# Altium PCB AMISyringeDriverHW10.PcbDoc
Units mm, origin at the board's own origin, x right, y up, seen from the top; angles counter-clockwise.
Board outline 96 x 43.5 mm, 2 copper layers (Top Layer, Bottom Layer); 55 components, 52 nets, 199 pads, 126 vias.
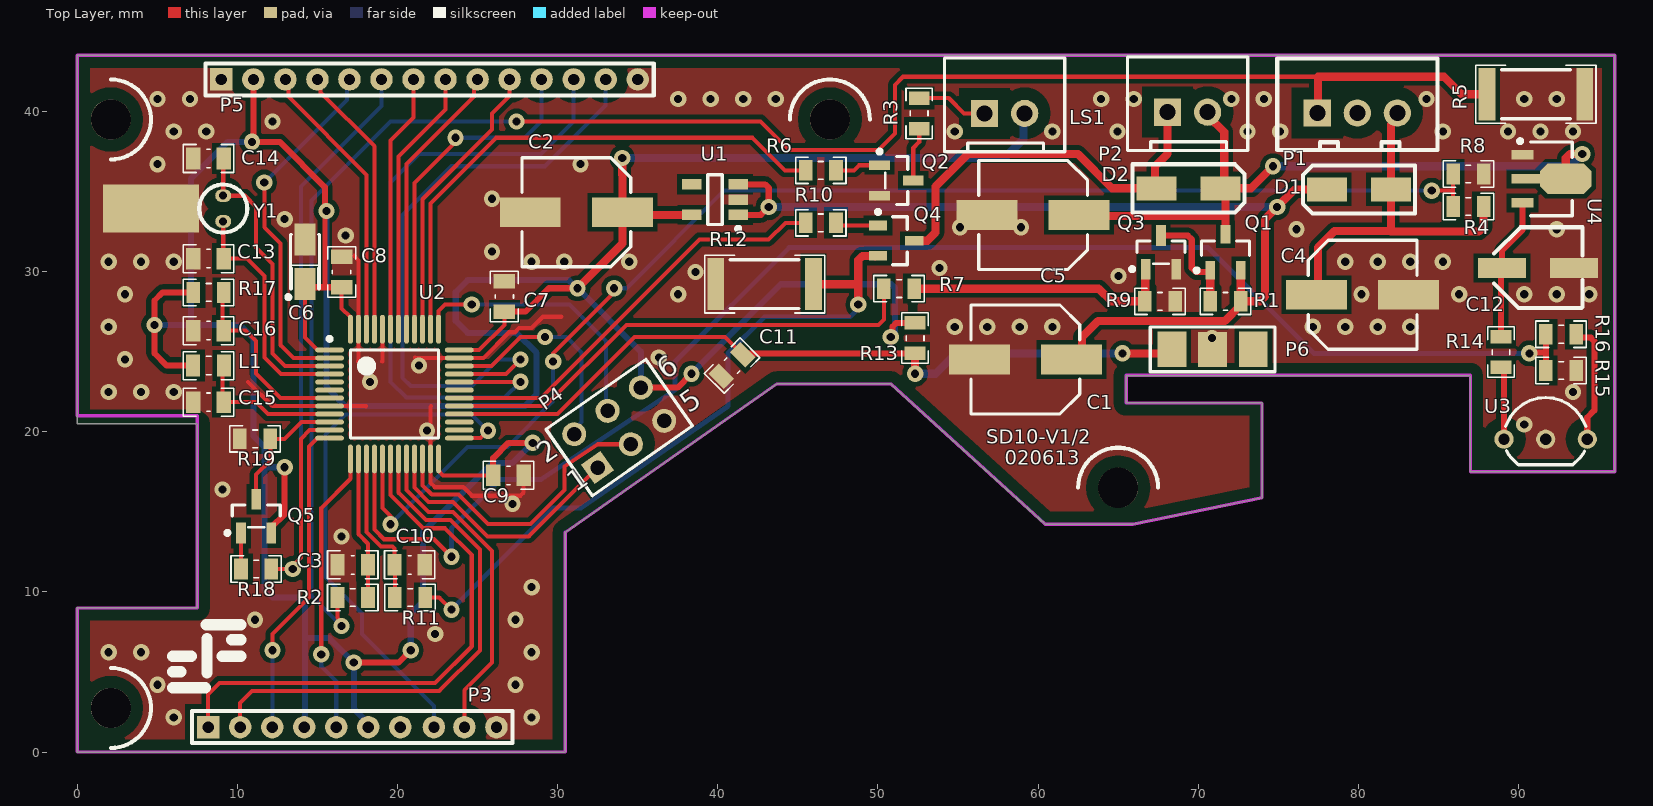
[diagram p0: Top Layer view]
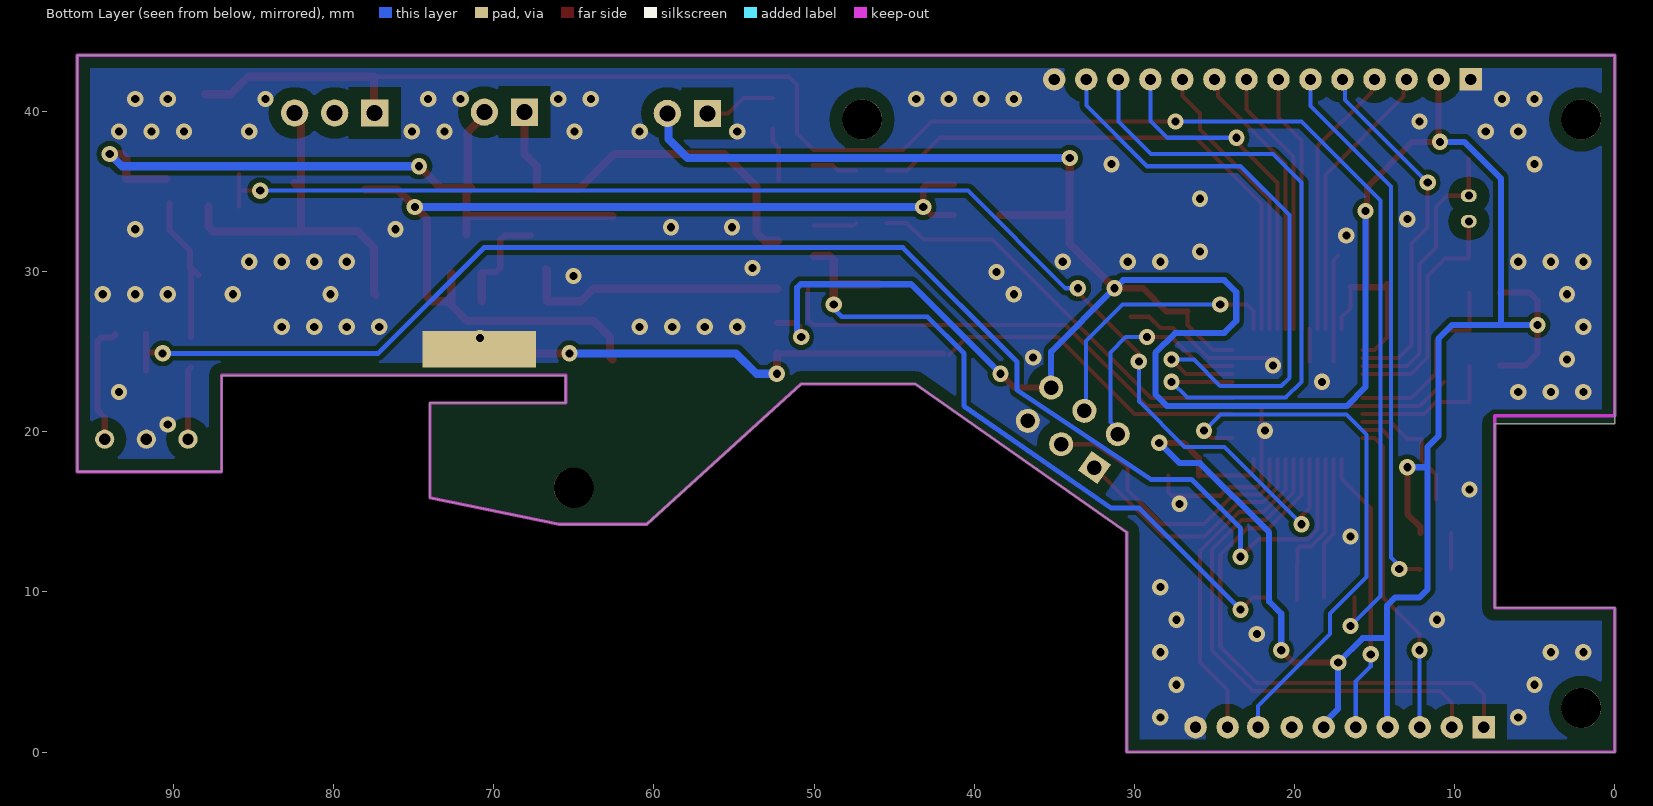
[diagram p1: Bottom Layer view, seen from below]
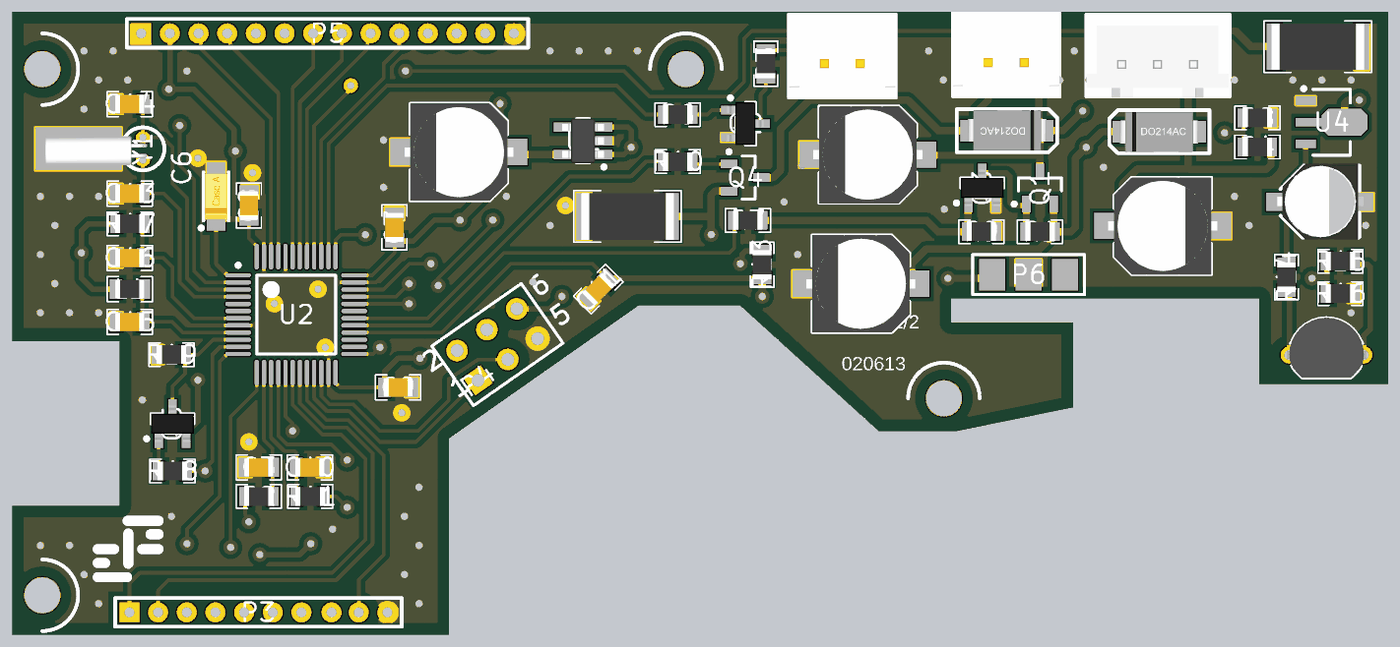
[diagram p2: 3D render of the assembled board from above, using the file's embedded part models]

## Layer stack, top to bottom
Top Layer: signal copper 0.0356
Dielectric: dielectric 0.32, FR-4, Dk 4.8
Bottom Layer: signal copper 0.0356

## Board outline
0,9 7.5,9 7.5,20.5 0,20.5 0,43.5 96,43.5 96,17.5 87,17.5 87,23.5 65.5,23.5 65.5,21.8 74,21.8 74,15.875 65.913,14.224 60.452,14.224 50.8,22.987 43.688,22.987 30.48,13.716 30.48,0 0,0

## Design rules (kind name [scope] priority, off if disabled: settings)
Clearance [All] p1: gap=0.305
HoleSize [All] p1: absolutevalues=TRUE maxlimit=12.7 minlimit=0.025 maxpercent=80.000 minpercent=20.000
PolygonConnect [All] p1: connectstyle=Direct reliefconductorwidth=0.254 reliefentries=4 polygonreliefangle="90 Angle"
RoutingVias [All] p1: holewidth=0.508 width=1.016 viastyle="Through Hole" minholewidth=0.508 minwidth=1.016 maxholewidth=0.711 maxwidth=1.27
SilkscreenOverComponentPads SilkToSolderMaskClearance [IsPad] p1: minsilkscreentomaskgap=0.254
SolderMaskExpansion [All] p1: expansion=0.102
Width [All] p1: maxlimit=0.508 minlimit=0.254 preferedwidth=0.254 minimp=50.000000 maximp=50.000000 favimp=50.000000
26 further rules are at their usual default settings.

## Components (designator, comment, footprint, x,y, rotation, side; value= is the part's Value field where it differs from the comment)
C1 "100uF" CAP_EL_SMD_6.3X5.4 59.207,24.511 r180 top
C2 "100uF" CAP_EL_SMD_6.3X5.4 31.166,33.706 r180 top
C3 "100nF" CAP0805 17.206,11.684 r0 top
C4 "100uF" CAP_EL_SMD_6.3X5.4 80.264,28.55 r0 top
C5 "100uF" CAP_EL_SMD_6.3X5.4 59.69,33.528 r180 top
C6 "10uF" CAP_TANTAL_TYPE_A 11.836,32.603 r270 top
C7 "100nF" CAP0805 26.67,28.448 r270 top
C8 "100nF" CAP0805 16.51,29.972 r270 top
C9 "100nF" CAP0805 26.924,17.272 r180 top
C10 "100nF" CAP0805 20.762,11.684 r180 top
C11 "100nF" CAP0805 40.894,24.13 r45 top
C12 "10uF" CAP_EL_SMD_4X5.3 91.222,30.226 r0 top
C13 "10pF" CAP0805 8.204,30.81 r0 top
C14 "10pF" CAP0805 8.204,37.059 r0 top
C15 "100nF" CAP0805 8.204,21.844 r0 top
C16 "100nF" CAP0805 8.204,26.314 r0 top
D1 "US1M" DO-241AC 80.112,35.128 r180 top
D2 "US1M" DO-241AC 69.317,35.204 r0 top
L1 "100uH" IND0805 8.204,24.13 r0 top
LS1 "SPK" XH-2PIN 57.912,39.878 r0 top
P1 "Battery" XH-3PIN 79.934,39.903 r0 top
P2 "Motor Output" XH-2PIN 69.337,39.954 r0 top
P3 "Header 10" HDR_1X10-2MM 17.177,1.552 r0 top
P4 "Header 3X2" HDR2X3 32.494,17.762 r35 top
P5 "Header 14" HDR_1X14-2MM 22,42 r0 top
P6 "PCB SWITCH" MICROSW_VERTICAL 70.901,25.146 r0 top
Q1 "IRLML6402" Micro3_N 71.704,31.2 r90 top
Q2 "PMBT3904" SOT23_N 51.156,35.687 r0 top
Q3 "PMBT3904" SOT23_N 67.676,31.2 r90 top
Q4 "IRLML2502" SOT-23_N 51.13,31.928 r0 top
Q5 "PMBT3906" SOT23_N 11.176,14.732 r90 top
R1 "100K" RES0805 71.704,28.143 r180 top
R2 "470K" RES0805 17.206,9.652 r180 top
R3 "47R" RES0805 52.578,39.878 r270 top
R4 "470K" RES0805 86.868,34.061 r180 top
R5 "0R500" RES2512 91.086,41.072 r180 top
R6 "10K" RES0805 46.431,36.322 r180 top
R7 "10K" RES0805 51.323,28.931 r0 top
R8 "100K" RES0805 86.868,36.093 r0 top
R9 "470K" RES0805 67.615,28.143 r0 top
R10 "10K" RES0805 46.431,33.045 r0 top
R11 "470K" RES0805 20.787,9.652 r0 top
R12 "0R500" RES2512 42.926,29.21 r0 top
R13 "10K" RES0805 52.324,25.842 r270 top
R14 "100R" RES0805 88.9,24.968 r270 top
R15 "100K" RES0805 92.659,26.086 r0 top
R16 "82K" RES0805 92.659,23.825 r180 top
R17 "10K" RES0805 8.204,28.702 r180 top
R18 "10K" RES0805 11.176,11.43 r180 top
R19 "10k" RES0805 11.11,19.558 r0 top
U1 "XC6204E331MR" SOT-23-5 39.827,34.493 r180 top
U2 "STM32F103C8T6" LQFP48_N 19.812,22.352 r0 top
U3 "UGN3503/AN503" "TO-92 BENT" 91.694,19.533 r0 top
U4 "HT7550-2" SOT89N 92.05,35.789 r0 top
Y1 "32.768kHz" CRYSTAL_NC308-RA 9.119,33.934 r270 top

## Footprints (in the part's own frame and the unit in brackets; to place one, negate y for a bottom-side part, rotate by r counter-clockwise, add the part's x,y. Pads: shape width x height; smd on the part's side, far side on the other; paste and mask are expansions set on the pad)
CAP0805 [mm] "Chip Capacitor, 2-Leads, Body 2/00x1/25mm, IPC Medium Density DESIGNER:ABBAS BASEREH"
  rect 0.9x1.35 smd: 1(-0.95,0) 2(0.95,0)
  silkscreen extent -1.58,-0.87 1.58,0.88, body extent -1.03,-0.65 1.02,0.65, height 0.5
CAP_EL_SMD_4X5.3 [mm]
  rect 3x1.25 smd: 1(-2.25,0) 2(2.25,0)
  silkscreen extent -2.74,-2.49 2.77,2.54, body extent -2.96,-2.62 3.04,2.68, height 6.42
CAP_EL_SMD_6.3X5.4 [mm] "Aluminum Electrolytic Capacitor, Body 6.60x6.60x5.80mm, IPC Low Density"
  rect 3.8x1.85 smd: 1(-2.875,0) 2(2.875,0)
  silkscreen extent -3.4,-3.4 3.4,3.4, body extent -3.8,-3.4 3.8,3.4, height 6.36
CAP_TANTAL_TYPE_A [mm]
  rect 2x1.3 smd: 1(3.393,2.388) 2(0.593,2.388)
  silkscreen extent 0.29,1.22 4.32,3.29, body extent 0.41,1.59 3.61,3.19, height 1.6
CRYSTAL_NC308-RA [mm] "32.768khz N308 Right angle"
  oval 0.8x1 hole 0.5: 1(0.8,0) 2(-0.8,0)
  rect 3x6 smd: 3(0,-4.5)
  silkscreen extent -1.5,-1.5 1.5,1.5, body extent -0.87,-6.81 1.13,0.33, height 2.2
DO-241AC [mm]
  rect 2.5x1.5 smd: 1(-1.918,-0.005) 2(2.082,-0.005)
  silkscreen extent -3.42,-1.5 3.58,1.5, body extent -2.64,-1.37 2.84,1.42, height 2.39
HDR2X3 [mm] "Connector; Header; 3x2 Position"
  rect 1.5x1.5 hole 0.9: 1(0,0)
  round 1.5 hole 0.9: 2(0,2.54) 3(2.54,0) 4(2.54,2.54) 5(5.08,0) 6(5.08,2.54)
  silkscreen extent -1.27,-1.27 6.35,3.81
HDR_1X10-2MM [mm]
  rect 1.4x1.4 hole 0.7: 1(-9,0)
  round 1.4 hole 0.7: 2(-7,0) 3(-5,0) 4(-3,0) 5(-1,0) 6(1,0) 7(3,0) 8(5.097,0) 9(7,0)
  round 1.4 hole 0.7 mask+0.102: 10(9,0)
  silkscreen extent -10,-1 10,1
HDR_1X14-2MM [mm]
  rect 1.4x1.4 hole 0.7: 1(-13,0)
  round 1.4 hole 0.7: 2(-11,0) 3(-9,0) 4(-7,0) 5(-5,0) 6(-3,0) 7(-1,0) 8(1,0) 9(3,0) 10(5,0) 11(7,0) 12(9,0) 13(11,0) 14(13,0)
  silkscreen extent -14,-1 14,1
IND0805 [mm] "Chip Inductor, 2-Leads, Body 2/00x1/25mm, IPC Medium Density DESIGNER:ABBAS BASEREH"
  rect 0.87x1.37 smd: 1(-0.97,0) 2(0.97,0)
  silkscreen extent -1.57,-0.87 1.58,0.87, body extent -1.02,-0.65 1.03,0.65, height 0.5
LQFP48_N [mm] "Thin QFP, 48-Leads, Body 7x7mm, Pitch 0.5mm, IPC Medium Density"
  oval 1.8x0.3 smd: 1(-4.05,2.75) 2(-4.05,2.25) 3(-4.05,1.75) 4(-4.05,1.25) 5(-4.05,0.75) 6(-4.05,0.25) 7(-4.05,-0.25) 8(-4.05,-0.75) 9(-4.05,-1.25) 10(-4.05,-1.75) 11(-4.05,-2.25) 12(-4.05,-2.75) 25(4.05,-2.75) 26(4.05,-2.25) 27(4.05,-1.75) 28(4.05,-1.25) 29(4.05,-0.75) 30(4.05,-0.25) 31(4.05,0.25) 32(4.05,0.75) 33(4.05,1.25) 34(4.05,1.75) 35(4.05,2.25) 36(4.05,2.75)
  oval 0.3x1.8 smd: 13(-2.75,-4.05) 14(-2.25,-4.05) 15(-1.75,-4.05) 16(-1.25,-4.05) 17(-0.75,-4.05) 18(-0.25,-4.05) 19(0.25,-4.05) 20(0.75,-4.05) 21(1.25,-4.05) 22(1.75,-4.05) 23(2.25,-4.05) 24(2.75,-4.05) 37(2.75,4.05) 38(2.25,4.05) 39(1.75,4.05) 40(1.25,4.05) 41(0.75,4.05) 42(0.25,4.05) 43(-0.25,4.05) 44(-0.75,4.05) 45(-1.25,4.05) 46(-1.75,4.05) 47(-2.25,4.05) 48(-2.75,4.05)
  silkscreen extent -4.17,-2.75 2.75,3.57, body extent -3.5,-3.5 3.5,3.5, height 1.6
Micro3_N [mm] "SOT23, 3-Leads, Body 2.9x1.3mm, Pitch 0.95mm, Lead Span 2.3mm, IPC Medium Density"
  rect 1.15x0.6 smd: 1(-1.125,0.95) 2(-1.125,-0.95) 3(1.125,0)
  silkscreen extent -1.25,-1.5 0.7,1.92, body extent -0.7,-1.5 0.7,1.5, height 1.12
MICROSW_VERTICAL [mm] "Vertical micro switch"
  rect 1.8x2.2 smd: 1(2.54,0) 2(0,-0.007) 3(-2.54,0)
  rect 7.1x2.3 smd far side: 4(0,0)
  silkscreen extent -3.9,-1.4 3.9,1.4
RES0805 [mm] "Chip Resistor, 2-Leads, Body 2/00x1/25mm, IPC Medium Density DESIGNER:ABBAS BASEREH"
  rect 0.85x1.3 smd: 1(-0.95,0) 2(0.95,0)
  silkscreen extent -1.58,-0.82 1.58,0.82, body extent -1.02,-0.65 1.02,0.65, height 0.5
RES2512 [mm] "Chip Resistor, 2-Leads, Body 6/40x3/20mm, IPC Medium Density DESIGNER:ABBAS BASEREH"
  rect 1.05x3.25 smd: 1(-3.05,0) 2(3.05,0)
  silkscreen extent -3.75,-1.8 3.75,1.8, body extent -3.22,-1.63 3.22,1.63, height 0.7
SOT23_N [mm] "SOT23, 3-Leads, Body 2.9x1.3mm, Pitch 0.95mm, Lead Span 2.3mm, IPC Medium Density"
  rect 1.3x0.6 smd: 1(-1.05,0.95) 2(-1.05,-0.95) 3(1.05,0)
  silkscreen extent -1.17,-1.5 0.7,1.92, body extent -1.27,-1.5 1.27,1.5, height 1.1
SOT89N [mm] "SOT89, 3-Leads, Body 4.5x2.4 mm, Pitch 1.5mm, Lead Span 4.1mm, IPC Medium Density"
  rect 1.4x0.6 smd: 1(-1.8,1.5) 3(-1.8,-1.5)
  rect 1.8x0.6 smd: 2(-1.6,0)
  oct 3.2x1.9 smd: 2(0.9,0)
  silkscreen extent -2.07,-2.3 1.3,2.47, body extent -1.3,-2.3 1.3,2.3, height 1.6
SOT-23-5 [mm] "SOT23, 5-Leads, Body 2.90x2.80mm, Pitch 0.95mm, IPC Low Density"
  rect 1.2x0.65 smd: 1(-1.45,0.95) 2(-1.45,0) 3(-1.45,-0.95) 4(1.45,-0.95) 5(1.45,0.95)
  silkscreen extent -1.58,-1.55 0.45,1.95, body extent -1.49,-1.55 1.49,1.55, height 1.3
SOT-23_N [mm] "SOT23, 3-Leads, Body 2.9x1.3mm, Pitch 0.95mm, Lead Span 2.3mm, IPC Medium Density"
  rect 1.15x0.6 smd: 1(-1.125,0.95) 2(-1.125,-0.95) 3(1.125,0)
  silkscreen extent -1.25,-1.5 0.7,1.92, body extent -0.7,-1.5 0.7,1.5, height 1.11
"TO-92 BENT" [mm] "DESIGNER :ABBAS BASEREH"
  round 1.2 hole 0.7: 1(-2.6,0) 2(0,0) 3(2.6,0)
  silkscreen extent -2.51,-1.6 2.51,2.6, body extent -2.79,-1.59 2.79,2.61, height 10
XH-2PIN [mm]
  rect 1.7x1.7 hole 1: 1(-1.25,0)
  round 1.7 hole 1: 2(1.25,0)
  silkscreen extent -3.75,-2.4 3.75,3.45, body extent -3.7,-2.35 3.7,3.4, height 7
XH-3PIN [mm]
  rect 1.7x1.7 hole 1: 1(-2.5,0)
  round 1.7 hole 1: 2(0,0) 3(2.5,0)
  silkscreen extent -5,-2.31 5,3.4, body extent -4.98,-2.42 4.92,3.33, height 7

## Part data
C1 C4 C5: library part Cap2, "Electrolyte 16V"
C2: library part Cap2, "Electrolyte  16V"
C3 C7 C8 C9 C10 C11 C13 C14 C15 C16: library part Cap, "Capacitor"
C6: library part Cap2, "tantal 10V"
C12: library part Cap2, "Electrolyte 10V"
D1 D2: library part "Diode 1N4001", "1 Amp General Purpose Rectifier"
L1: library part Inductor, "Ferrite Bead"
LS1: library part Buzzer, "Magnetic Transducer Buzzer"
P1: library part "Header 3", "Header, 3-Pin"
P2: library part "Header 2", "Header, 2-Pin"
P3: "Header, 10-Pin"
P4: "Header, 3-Pin, Dual row"
P5: "Header, 14-Pin"
P6: library part "Header 4", "Header, 4-Pin"
Q1: library part IRLML6401, "HEXFET Power MOSFET"
Q2 Q3: "NPN Switching Transistor"
Q4: library part IRLML2402, "HEXFET Power MOSFET"
Q5: "PNP Switching Transistor"
R1 R2 R3 R4 R5 R6 R7 R8 R9 R10 R11 R12 R13 R14 R15 R16 R17 R18 R19: library part Res1, "Resistor"
U1: "300mA/150mA High Speed LDO Regulators with ON-OFF Control"
U2: "STM32 ARM-based 32-bit MCU with 64 Kbytes Flash, 48-pin LQFP, Industrial Temperature"
U3: library part UGN3503, "RATIOMETRIC, LINEAR / HALL-EFFECT SENSORS"
U4: library part HT7530-1, "5.0V 100mA Low Power,  Low Dropout Voltage (LDO) Regulator"
Y1: library part XTAL_Crystal_G, "XTAL Crystal"

## Free pads (board coordinates)
  round 2.5 hole 2.5: ""(2.1,2.75) ""(2.1,39.5) ""(47,39.5) ""(65,16.5)

## Via types
v1: diameter 1.016, hole 0.508, Top Layer to Bottom Layer, tented both sides, 117 vias
v2: diameter 1.016, hole 0.508, Top Layer to Bottom Layer, 9 vias

## Nets (pads, with @x,y where several pads share a name; then routed paths per layer and width w, separated by ;. In a path a pad name is that pad's centre, name@x,y a point inside that pad or via, vN(x,y) a via of type N, cw(c..) or ccw(c..) an arc to the next point about the centre after c; other vN are vias at no path point)
+3V3: C2.1 C6.1 C7.2 C8.2 C9.2 L1.1 LS1.2 P3.4 P3.6 P4.6 P5.2 Q5.2 R13.1 R17.2 U1.5 U2.1 U2.24 U2.36 U2.48 | length 250.1
  Top Layer w0.254: C6.1 14.224,25.89 15.012,25.102 U2.1 ; C8.2 16.51,27.704 17.062,27.152 U2.48 ; U2.24 22.562,17.564 22.854,17.272 C9.2 ; U2.36 25.102,25.102 26.67,26.67 C7.2
  Top Layer w0.305: 15.467,29.049 v1@15.467,33.782
  Top Layer w0.381: L1.1@7.158,24.13 5.588,24.13 4.826,24.892 v1(4.826,26.67) 4.826,28.194 5.334,28.702 R17.2@7.178,28.702 ; P5.2 11,38.178 v1(10.922,38.1) 12.645,38.1 15.467,35.279 15.467,33.885 v1(15.57,33.782) ; Q5.2 12.126,14.032 12.954,14.86 v1(12.954,17.78) ; C6.1 14.412,29.022 15.494,29.022 ; 15.467,29.049 15.494,29.022 ; C8.2 15.494,29.022 ; v1(17.272,5.588) 20.066,5.588 v1(20.828,6.35) ; C9.2 25.974,18.354 26.924,19.304 v1(28.448,19.304) ; C7.2 27.993,27.498 29.451,28.956 v1(31.242,28.956) ; P4.6 37.488,22.756 v1(38.354,23.622) ; v1(50.8,25.908) 50.922,26.03 50.922,26.569 51.145,26.792 R13.1
  Top Layer w0.508: v1(31.242,28.956) 34.041,31.755 C2.1 ; v1(34.036,37.084) 34.036,36.068 34.041,36.063 C2.1 ; U1.5 34.203,33.543 C2.1
  Bottom Layer w0.381: v1(4.826,26.67) 7.112,26.67 ; v1(10.922,38.1) 9.398,38.1 7.112,35.814 7.112,26.67 ; v1(12.954,17.78) 11.684,17.78 ; P3.4 14.224,1.599 14.224,7.112 ; v1(15.57,33.782) 15.57,22.784 16.751,21.603 27.953,21.603 28.689,22.339 28.689,24.927 27.454,26.162 24.384,26.162 24.384,26.175 23.635,26.924 23.635,28.715 24.384,29.464 30.701,29.464 31.209,28.956 v1(31.242,28.956) 35.198,25 P4.6 ; P3.6 18.177,1.783 17.272,2.688 v1(17.272,5.588) 15.748,7.112 14.224,7.112 ; v1(20.828,6.35) 20.828,8.636 21.59,9.398 21.59,13.716 25.908,18.034 27.178,18.034 v1(28.448,19.304) ; v1(38.354,23.622) 43.942,29.21 50.831,29.21 51.054,28.987 51.054,26.162 v1(50.8,25.908) ; 7.112,26.67 10.16,26.67 11,25.83 11,19.734 11.684,19.05 11.684,17.78 ; 11.684,17.78 11.684,10.16 12.192,9.652 13.716,9.652 14.224,9.144 14.224,7.112
  Bottom Layer w0.508: v1(34.036,37.084) 57.912,37.084 59.094,38.266 59.094,39.81 LS1.2
+5V: C12.1 R14.1 U4.3 | length 9.6
  Top Layer w0.381: C12.1@88.453,29.791 C12.1@88.961,30.299 ; R14.1 88.9,30.154 C12.1 88.972,31.314 90.25,32.592 U4.3
BAT+: C4.1 D1.1 P1.3 R4.1 | length 23.3
  Top Layer w0.508: C4.1 77.47,28.631 77.47,31.496 78.499,32.525 82.029,32.525 ; D1.1@82.434,35.537 D1.1 ; P1.3 82.434,39.581 82.029,39.176 D1.1 ; R4.1 87.818,32.81 87.52,32.512 82.042,32.512 82.029,32.525 ; 82.029,32.525 D1.1
BAT-: P1.1 R2.2 R5.2 | length 111.8
  Top Layer w0.254: R2.2 16.256,8.382 16.51,8.128 v1(16.51,7.874) ; v1(27.432,39.37) 42.672,39.37 44.45,37.592 50.038,37.592 51.054,38.608 51.054,41.656 51.562,42.164 77.47,42.164
  Top Layer w0.508: P1.1 77.47,39.94 77.47,42.164 85.344,42.164 86.436,41.072 R5.2
  Bottom Layer w0.254: v1(16.51,7.874) 14.63,9.754 14.63,34.442 19.558,39.37 v1(27.432,39.37)
BAT_CUR: C3.2 R2.1 U2.14 | length 8.9
  Top Layer w0.254: U2.14 17.562,13.598 18.156,13.004 C3.2 R2.1
BAT_VOLT: R4.2 R8.1 U2.17 | length 83.1
  Top Layer w0.254: U2.17 19.062,15.228 19.558,14.732 v1(19.558,14.224) ; v1(29.718,24.384) 29.718,24.892 33.528,28.702 v1(33.528,28.956) ; v1(84.582,35.052) 85.852,35.052 ; R4.2 R8.1
  Bottom Layer w0.254: v1(19.558,14.224) 24.384,19.05 26.865,19.05 29.718,21.903 v1(29.718,24.384) ; v1(33.528,28.956) 34.29,28.956 40.386,35.052 v1(84.582,35.052)
BUZZER: R6.2 U2.38 | length 33.8
  Top Layer w0.254: U2.38 22.062,34.254 24.13,36.322 26.162,38.354 42.164,38.354 44.196,36.322 R6.2
GND: C1.2 C2.2 C3.1 C4.2 C5.2 C6.2 C7.1 C8.1 C9.1 C10.1 C11.1 C12.2 C13.1 C14.1 C15.1 C16.1 P3.10 P4.5 P5.1 P5.14 P6.2 P6.4 Q2.2 Q3.2 R5.1 R8.2 R9.2 R12.1 R16.1 R19.1 U1.2 U2.8 U2.23 U2.35 U2.44 U2.47 U3.2 U4.1 Y1.3 | length 39.1
  Top Layer w0.254: 10.668,23.114 12.18,21.602 U2.8 18.022,21.602 18.034,21.59 ; 17.272,30.988 17.562,30.698 U2.47 17.562,24.42 17.526,24.384 ; 19.05,24.384 19.062,24.396 U2.44 ; 21.082,24.638 21.118,24.602 U2.35 25.364,24.602 26.972,26.21 27.341,26.21 27.601,26.469 28.374,26.469 29.083,27.178 30.226,27.178 ; 22.098,21.59 22.062,21.554 U2.23 22.062,16.8 22.328,16.534 24.106,16.534 24.638,16.002 27.686,16.002 27.874,16.19 C9.1
  other v1: 6.027,2.164 28.379,2.164 5.011,4.196 27.363,4.196 1.963,6.228 3.995,6.228 28.379,6.228 22.352,7.366 11.107,8.26 27.363,8.26 28.379,10.292 9.075,16.388 90.355,20.452 1.963,22.484 3.995,22.484 6.027,22.484 93.403,22.484 2.979,24.516 36.322,24.638 70.866,25.857 1.963,26.548 54.795,26.548 56.827,26.548 58.859,26.548 60.891,26.548 77.147,26.548 79.179,26.548 81.211,26.548 83.243,26.548 2.979,28.58 37.523,28.58 80.195,28.58 86.291,28.58 90.355,28.58 92.387,28.58 94.419,28.58 65.024,29.718 53.848,30.226 1.963,30.612 3.995,30.612 6.027,30.612 28.379,30.612 30.411,30.612 34.475,30.612 79.179,30.612 81.211,30.612 83.243,30.612 85.275,30.612 25.908,31.242 76.131,32.644 92.387,32.644 55.118,32.766 58.928,32.766 25.908,34.544 5.011,36.708 31.427,36.708 6.027,38.74 8.059,38.74 54.795,38.74 60.891,38.74 64.955,38.74 73.083,38.74 75.115,38.74 85.275,38.74 89.339,38.74 91.371,38.74 93.403,38.74 12.192,39.37 5.011,40.772 7.043,40.772 37.523,40.772 39.555,40.772 41.587,40.772 43.619,40.772 63.939,40.772 65.971,40.772 72.067,40.772 74.099,40.772 84.259,40.772 90.355,40.772 92.387,40.772
  other v2: 16.51,13.462 27.178,15.494 21.844,20.066 18.288,23.114 21.336,24.13 38.608,29.972 16.764,32.258 12.954,33.274
KEY_Power: P5.6 R18.1 U2.11 | length 45.4
  Top Layer w0.254: U2.11 14.514,20.102 13.97,19.558 13.97,12.144 13.462,11.636 v1(13.462,11.43) v1@12.954,11.43 ; v1@12.954,11.43 12.258,11.43 12.192,11.364 R18.1 v1@12.954,11.43
  Bottom Layer w0.254: v1(13.462,11.43) 13.462,11.636 13.967,12.141 13.967,35.303 18.999,40.335 P5.6
KEY_PowerR: Q5.3 R19.2 U2.10 | length 8.3
  Top Layer w0.254: Q5.3 11.176,17.331 12.06,18.215 R19.2 12.954,19.558 13.998,20.602 U2.10
KEY_StartStop: P5.5 U2.2 | length 22.6
  Top Layer w0.254: v1(11.684,35.56) 11.684,32.766 12.7,31.75 12.7,25.4 13.498,24.602 U2.2
  Bottom Layer w0.254: v1(11.684,35.56) 16.837,40.713 16.837,41.837 P5.5
KEY_SyringeType: P5.3 U2.46 | length 17.7
  Top Layer w0.254: P5.3 13.183,41.817 13.183,40.919 18.062,36.04 U2.46
KEY_Time: P5.4 U2.45 | length 17.1
  Top Layer w0.254: P5.4 15.204,41.796 15.204,41.184 18.562,37.826 U2.45
LED_ALARM: P5.12 U2.32 | length 40.9
  Top Layer w0.254: U2.32 27.674,23.102 v1(27.686,23.114)
  Bottom Layer w0.254: v1(27.686,23.114) 26.695,22.123 20.549,22.123 19.558,23.114 19.558,35.56 21.336,37.338 28.956,37.338 31,39.382 P5.12
LED_BAT: P3.8 U2.25 | length 34.2
  Top Layer w0.254: U2.25 25.19,19.602 v1(25.654,20.066)
  Bottom Layer w0.254: P3.8 22.274,2.872 17.78,7.366 17.78,8.636 15.494,10.922 15.494,19.812 16.764,21.082 24.616,21.082 25.632,20.066 v1(25.654,20.066)
LED_SS: P5.13 U2.33 | length 39.7
  Top Layer w0.254: U2.33 26.771,23.602 27.553,24.384 v1@27.686,24.384
  Bottom Layer w0.254: v1(27.686,24.511) 26.289,24.511 24.638,22.86 20.828,22.86 20.32,23.368 20.32,33.528 23.368,36.576 29.21,36.576 33,40.366 P5.13
M+: D2.1 P2.1 Q4.3 | length 24.9
  Top Layer w0.508: Q4.3 53.086,31.928 53.594,32.436 53.594,35.306 55.626,37.338 62.484,37.338 64.622,35.2 67.221,35.2 67.31,35.289 67.31,36.576 68.087,37.353 P2.1
M-: C5.1 D2.2 P2.2 Q1.3 U4.2 | length 45.5
  Top Layer w0.508: C5.1@62.59,33.477 71.501,33.477 ; P2.2 70.587,39.757 71.628,38.716 71.628,35.429 71.704,35.353 D2.2@71.704,35.2 ; Q1.3 71.704,34.895 D2.2 D2.2@71.704,35.2 ; v1(74.676,36.576) 73.3,35.2 D2.2@71.704,35.2 ; U4.2@90.45,35.789 92.95,35.789 92.95,37.084 93.204,37.338 v1(93.98,37.338)
  Bottom Layer w0.508: v1(74.676,36.576) 93.218,36.576 v1(93.98,37.338)
MOT_CUR: C10.2 R11.1 U2.15 | length 10
  Top Layer w0.254: U2.15 18.062,13.744 18.979,12.827 19.685,12.827 19.812,12.7 C10.2 19.837,11.659 R11.1 R11.1@19.837,9.499
MOT_N: R10.1 U2.30 | length 26.2
  Top Layer w0.254: U2.30 28.96,22.102 38.862,32.004 43.18,32.004 44.221,33.045 R10.1
MOT_P: R7.1 U2.29 | length 30.7
  Top Layer w0.254: U2.29 29.222,21.602 34.29,26.67 50.038,26.67 50.373,27.005 R7.1
NEAREND: R15.1 R16.2 U2.16 | length 92.7
  Top Layer w0.254: U2.16 18.562,13.891 19.169,13.284 22.276,13.284 v1(23.368,12.192)
  Top Layer w0.381: v1(90.678,24.892) 90.742,24.956 91.709,24.956 ; R16.2 91.709,24.956 ; R15.1 91.709,24.956
  Bottom Layer w0.305: v1(23.368,12.192) 23.368,13.97 26.416,17.018 28.956,17.018 37.338,22.606 37.338,24.384 44.45,31.496 70.612,31.496 77.216,24.892 v1(90.678,24.892)
NetC13_2: C13.2 U2.4 Y1.1 | length 14.9
  Top Layer w0.254: Y1.1 9.119,30.846 C13.2 10.592,30.81 11.684,29.718 11.684,24.638 12.72,23.602 U2.4
NetC14_2: C14.2 U2.3 Y1.2 | length 18.1
  Top Layer w0.254: C14.2 9.119,37.023 Y1.2 10.478,34.734 11.176,34.036 11.176,31.496 12.192,30.48 12.192,24.892 12.982,24.102 U2.3
NetC15_2: C15.2 L1.2 U2.9 | length 9.3
  Top Layer w0.254: L1.2@9.078,24.11 9.078,21.844 11.176,21.844 11.918,21.102 U2.9
NetLS1_1: LS1.1 R3.1 | length 4.5
  Top Layer w0.254: R3.1 54.422,40.828 55.372,39.878 LS1.1
NetQ1_1: Q1.1 Q3.3 R1.2 | length 6.9
  Top Layer w0.381: Q3.3 69.35,32.25 69.596,32.004 69.596,30.226 69.85,29.972 70.696,29.972 Q1.1@70.754,29.914
  Top Layer w0.508: R1.2 Q1.1@70.754,29.914
NetQ2_1: Q2.1 R6.1 | length 2.9
  Top Layer w0.254: R6.1 48.514,36.322 48.829,36.637 Q2.1
NetQ2_3: Q2.3 R3.2 | length 3.4
  Top Layer w0.254: Q2.3 52.206,37.728 52.578,38.1 R3.2
NetQ3_1: Q3.1 R7.2 R9.1 | length 16.7
  Top Layer w0.508: R7.2 63.779,28.931 64.567,28.143 R9.1 66.695,28.174 66.695,30.119 Q3.1
NetQ4_1: Q4.1 R10.2 | length 2.7
  Top Layer w0.254: R10.2 47.549,32.878 Q4.1
NetQ4_2: Q4.2 R11.2 R12.2 | length 43.8
  Top Layer w0.254: R11.2 22.606,9.652 v1(23.368,8.89) ; Q4.2@49.832,30.805 Q4.2
  Top Layer w0.508: R12.2 48.768,29.21 ; v1(48.768,27.94) 48.768,29.21 ; Q4.2 49.032,30.978 48.768,30.714 48.768,29.21
  Bottom Layer w0.305: v1(23.368,8.89) 29.718,15.24 31.464,15.24 40.64,21.59 40.64,24.892 42.926,27.178 48.26,27.178 v1@48.895,27.813
NetQ5_1: Q5.1 R18.2 | length 2.3
  Top Layer w0.254: R18.2 Q5.1
NetR14_2: R14.2 U3.1 | length 4.6
  Top Layer w0.381: R14.2 89.094,23.824 U3.1
NetR15_2: R15.2 U3.3 | length 7.6
  Top Layer w0.381: R15.2 93.818,25.877 94.519,25.877 94.742,25.654 94.742,21.336 94.294,20.888 U3.3
RESET: C16.2 R17.1 U2.7 | length 12
  Top Layer w0.254: R17.1@9.078,28.702 9.078,26.314 10.516,26.314 11.176,25.654 11.176,23.622 12.7,22.098 15.758,22.098 U2.7
SEG_A: P3.1 U2.18 | length 34.3
  Top Layer w0.254: P3.1 8.177,3.605 8.89,4.318 22.352,4.318 24.638,6.604 24.638,12.297 22.965,13.97 21.635,13.97 19.562,16.043 U2.18
SEG_B: P3.2 U2.19 | length 32.8
  Top Layer w0.254: P3.2 10.177,3.065 10.922,3.81 22.606,3.81 25.146,6.35 25.146,12.654 23.322,14.478 21.774,14.478 20.062,16.19 U2.19
SEG_C: P3.9 U2.20 | length 20.6
  Top Layer w0.254: U2.20 20.562,16.36 21.936,14.986 23.46,14.986 25.908,12.538 25.908,5.588 24.177,3.857 P3.9
SEG_D: P5.10 U2.39 | length 17.9
  Top Layer w0.254: U2.39 21.562,34.516 25.908,38.862 25.908,39.878 27,40.97 P5.10
SEG_DP: P5.7 U2.43 | length 16.2
  Top Layer w0.254: U2.43 19.562,38.19 21,39.628 P5.7
SEG_E: P5.11 U2.40 | length 21.4
  Top Layer w0.254: U2.40 21.062,35.54 23.622,38.1 v2(23.622,38.354)
  Bottom Layer w0.254: v2(23.622,38.354) 27.94,38.354 29,39.414 P5.11
SEG_F: P5.9 U2.41 | length 17.4
  Top Layer w0.254: U2.41 20.562,36.713 24.781,40.932 24.781,41.781 P5.9
SEG_G: P5.8 U2.42 | length 16.8
  Top Layer w0.254: U2.42 20.062,37.182 23,40.12 P5.8
SEG_NUM1: P3.5 U2.13 | length 17.9
  Top Layer w0.254: v1(15.24,6.096) 15.24,15.24 17.062,17.062 U2.13
  Bottom Layer w0.254: v1(15.24,6.096) 15.24,5.334 16.177,4.397 P3.5
SEG_NUM2: P3.3 U2.12 | length 20
  Top Layer w0.254: v1(12.192,6.35) 12.192,7.366 14.478,9.652 14.478,19.068 15.012,19.602 U2.12
  Bottom Layer w0.254: P3.3 12.192,1.567 v1(12.192,6.35)
SWCLK: P4.4 U2.37 | length 17.1
  Top Layer w0.254: U2.37 22.562,27.544 22.958,27.94 v1(24.638,27.94)
  Bottom Layer w0.254: v1(24.638,27.94) 30.734,27.94 33.02,25.654 33.02,21.397 P4.4
SWDIO: P4.2 U2.34 | length 14.1
  Top Layer w0.254: U2.34 25.88,24.102 27.686,25.908 v1(29.21,25.908)
  Bottom Layer w0.254: v1(29.21,25.908) 30.539,25.908 31.496,24.951 31.496,20.614 31.037,20.155 P4.2
SWITCH_FB: C11.2 P6.3 R13.2 U2.28 | length 48.5
  Top Layer w0.254: U2.28 29.992,21.102 34.798,25.908 40.459,25.908 C11.2
  Top Layer w0.381: C11.2@41.91,24.892 R13.2
  Top Layer w0.508: v1(52.324,23.622) R13.2 ; v1(65.278,24.892) 68.107,24.892 P6.3
  Bottom Layer w0.508: v1(52.324,23.622) 53.594,23.622 54.864,24.892 v1(65.278,24.892)
USART3_RX: P4.3 U2.22 | length 18.5
  Top Layer w0.254: U2.22 21.571,18.293 21.571,16.645 22.139,16.077 23.801,16.077 25.654,14.224 28.309,14.224 30.441,16.356 30.441,17.838 32.512,19.219 P4.3
USART3_TX: P4.1 U2.21 | length 16.3
  Top Layer w0.254: U2.21 21.062,16.507 21.949,15.619 23.474,15.619 25.631,13.462 28.194,13.462 P4.1
VIN: C1.1 D1.2 Q1.2 R1.1 U1.1 U1.3 | length 62.5
  Top Layer w0.381: U1.1 42.687,33.543 v1(43.18,34.036) 43.18,35.22 42.957,35.443 U1.3
  Top Layer w0.508: C1.1@62.59,24.511 62.738,24.659 62.738,25.908 63.754,26.924 71.66,26.924 72.654,27.918 R1.1 ; Q1.2@72.654,29.914 R1.1 ; v1@75.067,34.036 v1(74.93,34.036) ; D1.2 76.281,35.133 76.027,35.133 v1(74.93,34.036) ; R1.1 73.87,28.143 74.168,28.441 74.168,33.274 v1(74.93,34.036)
  Bottom Layer w0.508: v1(43.18,34.036) v1(74.93,34.036)
pads on no net: P1.2 P3.7 P6.1 U1.4 U2.5 U2.6 U2.26 U2.27 U2.31

## Polygon pours and split planes (outlines as drawn)
GND on Top Layer "GND_L01_P000" (solid, remove dead copper, pour order 0): 0,8.992 7.5,8.992 7.5,20.498 0,20.498 0,43.51 96.012,43.51 96.012,17.501 86.995,17.501 86.995,23.495 65.507,23.495 65.507,21.793 73.99,21.793 73.99,15.875 65.913,14.224 60.452,14.224 50.8,22.987 43.688,22.987 30.48,13.716 30.48,0 0,0
GND on Bottom Layer "GND_L02_P001" (solid, remove dead copper, pour order 1): 0,8.992 7.5,8.992 7.5,20.498 0,20.498 0,43.51 96.012,43.51 96.012,17.501 86.995,17.501 86.995,23.495 65.507,23.495 65.507,21.793 73.99,21.793 73.99,15.875 65.913,14.224 60.452,14.224 50.8,22.987 43.688,22.987 30.48,13.716 30.48,0 0,0

## Keep-outs
Keep-Out Layer:
  lines w0.2: 0,0 30.48,0 30.48,13.716 43.688,22.987 50.8,22.987 60.452,14.224 65.913,14.224 73.99,15.875 73.99,21.793 65.507,21.793 65.507,23.55 86.995,23.55 86.995,17.501 96.012,17.501 96.012,43.51 0,43.51 0,21 7.5,21 7.5,8.992 0,8.992 0,0

## Other copper
Top Layer:

## Silkscreen, mask and mechanical layers (free items; w line width, h text height)
Top Overlay:
  lines w0.254: 2.1,0.25 ccw(c2.1,2.75) 2.1,5.25 ; 2.1,37 ccw(c2.1,39.5) 2.1,42 ; 44.5,39.496 cw(c47,39.5) 49.5,39.497 ; 62.5,16.508 cw(c65,16.5) 67.5,16.51
  lines w0.711: 5.969,4.013 8.001,4.013 ; 5.969,5.004 6.477,5.004 ; 5.969,5.971 7.112,5.971 ; 8.052,7.95 10.211,7.95 ; 8.103,4.953 8.103,7.061 ; 9.068,5.969 10.211,5.969 ; 9.652,7.01 10.211,7.01
  text "SD10-V1/2" at 56.769,18.923 h1.52
  text "020613" at 57.908,17.623 h1.52
Board:
  lines w0.2: 30.48,-0.1 ccw(c30.48,0) 30.58,0 cw(c30.48,0) 30.48,-0.1 ; 60.385,14.15 ccw(c60.452,14.224) 60.452,14.124 cw(c60.452,14.224) 60.385,14.15 ; 65.913,14.124 ccw(c65.913,14.224) 65.933,14.126 cw(c65.913,14.224) 65.913,14.124

## Text inside footprints (layer, text, board x,y; h text height)
P4: Top Overlay "6" at 36.738,23.214 h1.27 r35; Top Overlay "5" at 38.195,21.134 h1.27 r35; Top Overlay "2" at 29.248,17.97 h1.27 r35; Top Overlay "1" at 31.121,16.18 h1.27 r35